# Altium PCB CindyLou Main Board copy_2023-08-16.pcbdoc (part 2 of 2)
Units mil, origin at the board's own origin, x right, y up, seen from the top; angles counter-clockwise.
Board outline 2655.6 x 2783.4 mil, 2 copper layers (Top Layer, Bottom Layer); 79 components, 76 nets, 317 pads, 120 vias.
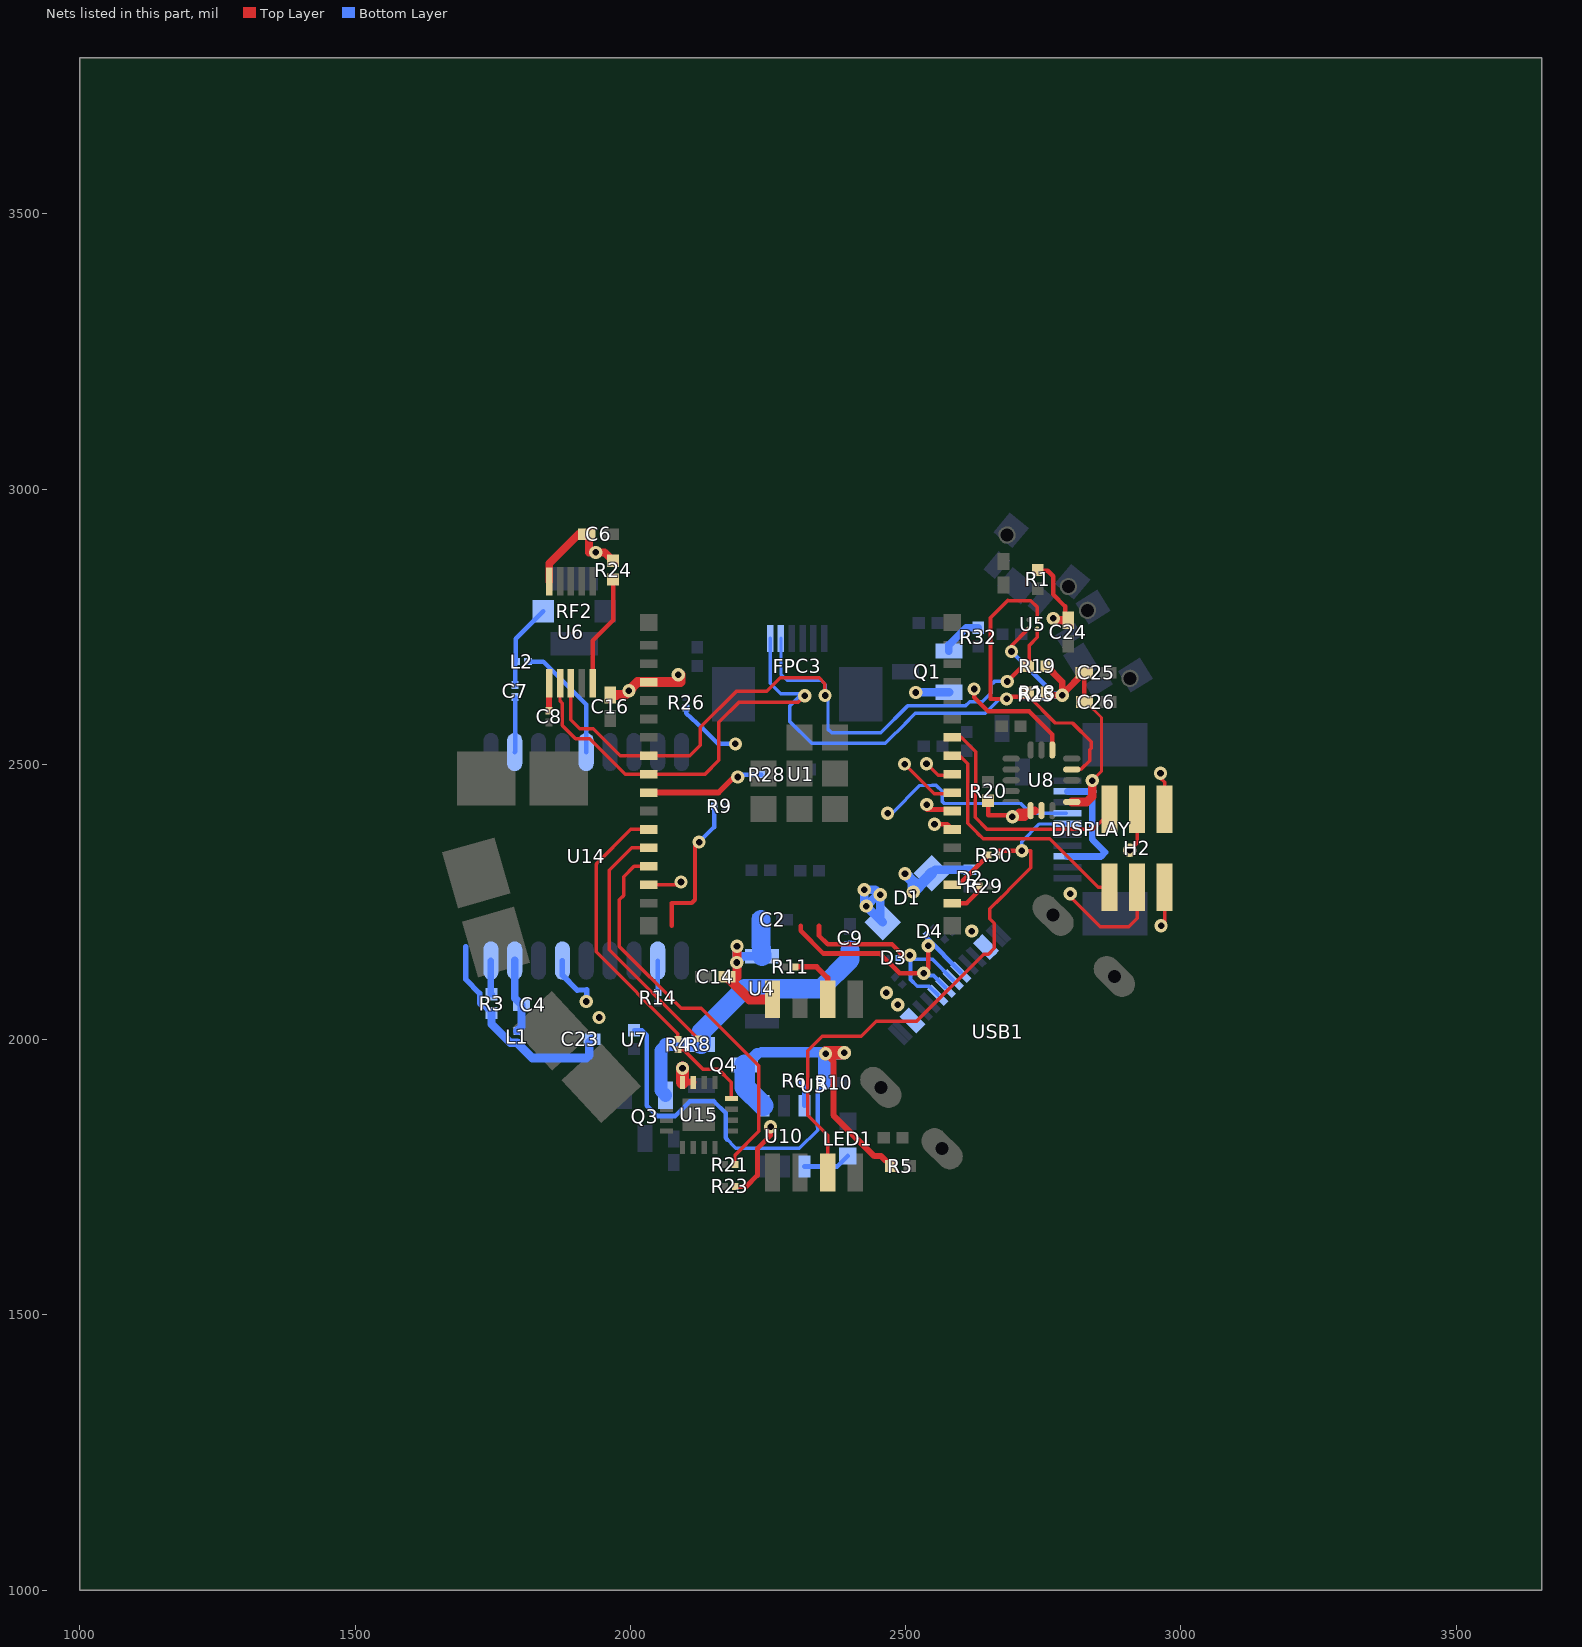
[diagram p2: the nets of this part, all layers, seen from the top]

## Via types
v1: diameter 24, hole 12, Top Layer to Bottom Layer, tented both sides, 120 vias

## Nets (pads, with @x,y where several pads share a name; then routed paths per layer and width w, separated by ;. In a path a pad name is that pad's centre, name@x,y a point inside that pad or via, vN(x,y) a via of type N, cw(c..) or ccw(c..) an arc to the next point about the centre after c; other vN are vias at no path point) (continued)
R32_2: Q1.1 R32.2 | length 77.2
  Bottom Layer w14: Q1.1@2578.57,2705.8 2578.57,2716.77 2610.04,2748.24 R32.2@2631.8,2748.24
RF2_1: C7.2 L2.1 RF2.1 | length 155.6
  Bottom Layer w8.33: C7.2@1790.7,2643.9 1790.7,2685.5 L2.1@1792,2686.8 1792,2728.5 RF2.1@1841.82,2778.28
RS: DISPLAY.4 R26.1 | length 873.1
  Mid-Layer 2 w10: v1(2190.69,2537.3) 2200.42,2547.03 2383.02,2547.03 2467.22,2462.83 v1(2467.2,2411.4)
  Bottom Layer w5.98: v1(2467.2,2411.4) 2475.42,2411.43 2525.72,2461.73 2555.42,2461.48
  Bottom Layer w6.3: 2548.02,2461.73 2555.82,2461.73 2566.52,2451.03 2566.52,2432.53 2570.02,2428.93 2709.52,2428.93 2727.12,2411.43 DISPLAY.4@2792.22,2411.43
  Bottom Layer w8: R26.1@2101.22,2602.42 2101.19,2592.9 2131.12,2565.43 2159.22,2537.33 v1(2190.69,2537.3)
RXD0: H2.5 U1.40 | length 444.2
  Top Layer w6.3: U1.40@2584.78,2549.14 2601.16,2549.14 2622.82,2527.48 ; 2622.82,2527.43 2627.32,2522.98 2626.32,2403.93 2647.82,2382.43 2840.82,2382.43 2870.52,2412.13 H2.5@2870.52,2418.5
S$70160: 
S$172033: 
SCL_BUS1: FPC3.6 R18.1 U1.8 U5.A2 U6.2 U8.4 | length 1913.9
  Top Layer w6.3: U6.2@1872.12,2647.53 1872.12,2615.63 1876.42,2611.33 1876.42,2570.63 1900.22,2546.83 1926.02,2546.83 1990.64,2482.21 U1.8@2033.6,2482.21 2135.6,2482.21 2160.82,2507.43 2160.82,2576.73 2197.22,2613.13 2305.22,2613.13 v1(2316.8,2624.7) ; 2685.5,2797.6 2727.4,2797.6 2739.07,2785.93 U5.A2@2739.07,2762.58 ; R18.1@2721.86,2630.6 2721.86,2625.33 2771.99,2575.2 2803.19,2575.2 2837.52,2540.87 2837.52,2529.43 2834.62,2526.53 2834.62,2506.88 2818.59,2490.84 U8.4@2801.97,2490.85
  Top Layer w7: v1(2683.4,2619) 2654.32,2619.03 2654.32,2766.43 2685.52,2797.63
  Top Layer w8: v1(2683.4,2619) 2687.53,2623.13 2721.82,2623.13 R18.1@2721.82,2630.63
  Bottom Layer w5.98: FPC3.6@2253.84,2728.95 2253.84,2647.61 2273.12,2628.33 2313.22,2628.33 v1(2316.8,2624.7)
  Bottom Layer w6.3: v1(2316.8,2624.7) 2308.12,2624.73 2289.12,2605.73 2289.12,2578.53 2329.42,2538.23 2463.32,2538.23 2502.82,2577.73 2511.32,2586.73 ; 2499.57,2574.48 2511.32,2586.73 ; v1(2683.4,2619) 2671.02,2619.03 2644.92,2592.93 2517.52,2592.93 2511.32,2586.73
SD_MODE: R4.1 U15.4 | length 150.9
  Top Layer w6.3: R4.1@2086.35,1981.35 2096.42,1981.33 2131.32,1946.53 2159.22,1946.53 2183.32,1922.53 U15.4@2183.3,1892.95
SDA_BUS1: FPC3.5 R19.1 U1.7 U5.B2 U6.3 U8.6 | length 1677.5
  Top Layer w6.3: U6.3@1891.84,2647.53 1891.84,2581.06 1908.15,2564.76 1932.35,2564.76 1981.43,2515.67 U1.7@2033.6,2515.67 2107.86,2515.67 2126.82,2534.63 2126.82,2567.12 2192.72,2633.03 2247.72,2633.03 2272.42,2657.73 2342.92,2657.73 2353.35,2646.66 v1(2353.8,2625.2) ; R19.1@2721.76,2678.4 2725,2681.64 2725,2716.7 2739.07,2730.77 U5.B2@2739.07,2746.84
  Top Layer w8: v1(2624.4,2637) 2624.42,2621.83 2649.82,2596.43 2724.32,2596.43 2766.52,2554.23 U8.6@2766.52,2526.23 ; v1(2684.52,2650.67) 2712.25,2678.4 R19.1@2721.76,2678.4
  Mid-Layer 2 w8: v1(2624.4,2637) 2648.22,2637.03 2661.86,2650.67 v1(2684.52,2650.67)
  Bottom Layer w5.98: FPC3.5@2273.52,2728.95 2273.52,2663.78 2284.77,2652.53 2346.42,2652.53 2353.82,2645.13 v1(2353.8,2625.2)
  Bottom Layer w6.3: v1(2353.8,2625.2) 2359.02,2625.23 2359.02,2564.13 2365.92,2557.23 2454.62,2557.23 2503.52,2606.13 2608.42,2606.13 2616.22,2613.93 2639.22,2613.93 2654.82,2629.53 2654.82,2644.03 2661.46,2650.67 v1(2684.52,2650.67)
SPI_CLK: DISPLAY.5 R30.2 U3.3 | length 1042.2
  Top Layer w6: 2674.52,2259.03 2698.32,2282.93 2727.22,2311.83 2727.22,2343.03 v1(2711.2,2343)
  Top Layer w6.3: U3.3@2358.2,1758.61 2358.22,1826.43 2322.32,1862.23 2322.32,1979.83 2348.42,2005.93 2419.52,2005.93 2446.92,2033.33 2519.82,2033.33 2641.72,2155.23 2650.62,2155.23 2661.12,2165.73 2661.12,2211.63 2653.12,2219.63 2653.12,2237.63 2674.52,2259.03
  Top Layer w8: R30.2@2669.32,2334.93 2669.32,2343.03 v1(2711.2,2343)
  Bottom Layer w5.98: v1(2711.2,2343) 2711.2,2359.8 2743.14,2391.75 DISPLAY.5@2794.22,2391.75
TXD0: H2.6 U1.39 | length 447.9
  Top Layer w6.3: U1.39@2584.78,2515.67 2598.13,2515.67 2612.82,2500.98 2612.82,2392.98 2630.32,2375.48 ; 2630.32,2375.43 2640.72,2365.03 2761.67,2365.03 2849.89,2276.81 H2.6@2870.52,2276.76
U1_9: R28.2 U1.9 | length 223.1
  Top Layer w10.4: U1.9@2033.6,2448.75 2159.94,2448.75 2192.82,2481.63 2192.82,2479.47 v1(2195.22,2477.07)
  Bottom Layer w8: v1(2195.22,2477.07) 2199.45,2481.3 R28.2@2238.19,2481.3
U1_11: R4.2 U1.11 | length 502.1
  Top Layer w6.3: U1.11@2033.6,2381.82 2000.51,2381.82 1937.72,2319.03 1937.72,2159.53 2086.35,2010.9 R4.2@2086.35,2000.37
U1_12: R8.2 U1.12 | length 462.2
  Top Layer w6.3: U1.12@2033.6,2348.35 2002.54,2348.35 1961.52,2307.33 1961.52,2163.1 R8.2@2123.35,2001.27
U1_13: R21.2 U1.13 | length 724.7
  Top Layer w6.3: U1.13@2033.6,2314.89 2006.52,2314.93 1987.62,2296.03 1987.62,2261.83 1979.82,2254.03 1979.82,2169.13 2092.02,2056.93 2128.92,2056.93 2233.22,1952.73 2233.22,1833.43 2190.02,1790.23 R21.2@2190.02,1772.93
U1_14: R23.2 U1.14 | length 719.9
  Top Layer w6.3: U1.14@2033.6,2281.42 2087.02,2281.42 v1(2092,2286.4)
  Top Layer w9: R23.2@2190.12,1733.13 2210.42,1733.13 2230.72,1753.43 2230.72,1801.83 2254.79,1825.9 v1(2254.79,1841.7)
  Mid-Layer 2 w9: v1(2092,2286.4) 2092.02,2244.43 2136.32,2200.13 2136.32,2122.23 2136.32,1960.17 v1(2254.79,1841.7)
U1_16: R9.2 | length 275
  Top Layer w8: 2074.94,2206.62 2074.94,2248.23 2111.52,2248.23 2117.42,2254.13 2117.42,2358.83 v1(2124.8,2358.8)
  Bottom Layer w8: v1(2124.8,2358.8) 2152.09,2386.09 R9.2@2152.11,2423.93
U1_31: R29.1 U1.31 | length 66.5
  Top Layer w8: U1.31@2584.78,2247.96 2610.95,2247.96 2633.72,2270.73 R29.1@2633.71,2278.83
U1_32: R30.1 U1.32 | length 87.7
  Top Layer w8: U1.32@2584.78,2281.42 2596.76,2281.42 R30.1@2650.31,2334.98
U1_35: H2.4 U1.35 | length 619.9
  Top Layer w6.3: v1(2799.22,2265.07) 2799.22,2259.68 2853.82,2205.08 2905.32,2205.08 2920.52,2220.28 H2.4@2920.52,2276.76
  Top Layer w8.4: v1(2552.5,2391.2) 2575.4,2391.2 U1.35@2584.78,2381.82
  Mid-Layer 2 w8.4: v1(2552.5,2391.2) 2627.42,2391.23 2653.32,2365.33 2653.32,2308.73 2678.32,2283.73 2719.72,2283.73 2745.22,2309.23 2786.32,2309.23 2799.22,2296.33 v1(2799.22,2265.07)
U1_36: H2.2 U1.36 | length 646.8
  Top Layer w6.3: v1(2964.12,2206.97) 2970.52,2213.38 H2.2@2970.52,2276.76
  Top Layer w8.4: v1(2538.52,2426.97) 2538.52,2417.98 U1.36@2587.09,2417.98
  Mid-Layer 2 w8.4: v1(2538.52,2426.97) 2545.36,2420.13 2629.72,2420.13 2680.72,2369.13 2762.82,2369.13 2924.98,2206.97 v1(2964.12,2206.97)
U1_37: H2.3 U1.37 | length 716.8
  Top Layer w6: v1(2498.09,2500.5) 2551.84,2446.75 2584.79,2446.75 U1.37@2584.78,2448.75
  Top Layer w6.3: v1(2907.4,2344.1) 2920.52,2357.22 H2.3@2920.52,2418.5
  Mid-Layer 2 w7.99: 2841.6,2419.9 2852.43,2409.08 2907.4,2409.08 v1(2907.4,2344.1)
  Mid-Layer 2 w8: v1(2498.09,2500.5) 2500.02,2500.53 2536.62,2463.83 2561.42,2463.83 2578.12,2480.53 2780.92,2480.53 2841.62,2419.93
U1_38: H2.1 U1.38 | length 567.7
  Top Layer w6: v1(2537.99,2501.3) 2559.08,2480.21 2584.79,2480.21 U1.38@2584.78,2482.21
  Top Layer w6.3: v1(2963.12,2483.77) 2963.12,2475.08 2970.52,2467.68 H2.1@2970.52,2418.5
  Mid-Layer 2 w6: 2918.4,2512.3 2946.93,2483.77 v1(2963.12,2483.77)
  Mid-Layer 2 w8: v1(2537.99,2501.3) 2538.39,2500.9 2771.1,2500.9 2782.5,2512.3 2918.4,2512.3
U3_6: R11.1 U3.6 | length 105.6
  Top Layer w10: R11.1@2299.81,2131.9 2338.52,2131.93 2358.22,2112.23 U3.6@2358.2,2073.2
U4_2: C9.2 Q3.2 Q4.2 | length 528.6
  Bottom Layer w23.7: Q3.2@2063.9,1898.87 2055.35,1907.42 2055.35,1980.16 2063.92,1988.73 2063.92,1991.36 Q4.2@2128.88,1991.36
  Bottom Layer w35: Q4.2@2128.92,1991.33 2128.92,2013.93 2207.32,2092.33 2345.82,2092.33 ; 2345.8,2092.29 2399.1,2145.59 C9.2@2399.1,2162.34
U6_1: C8.2 U6.1 | length 50.1
  Top Layer w10.31: C8.2@1852.12,2597.43 U6.1@1852.48,2647.54
U6_5: R24.1 U6.5 | length 203.6
  Top Layer w8.31: U6.5@1931.22,2647.54 1931.22,2724.93 1968.54,2762.25 R24.1@1968.55,2835.72
U10_1: LED1.1 U10.1 | length 86.6
  Bottom Layer w8.4: U10.1@2316.3,1769.48 2375.91,1769.48 LED1.1@2394.99,1788.58
U10_6: R6.1 U10.6 | length 48.9
  Bottom Layer w8.4: R6.1@2307.61,1925 2316.3,1916.32 U10.6@2316.3,1879.72
U14_2: R14.2 U14.2 | length 58.1
  Bottom Layer w8: U14.2@2049.64,2143.59 2049.62,2085.59 R14.2@2049.7,2085.51
U14_8: C4.2 L1.2 U14.8 | length 136.6
  Bottom Layer w14.33: U14.8@1789.8,2143.59 1789.78,2075.56 C4.2@1802.44,2062.9 1802.44,2024.04 L1.2@1794.1,2015.7
U14_9: R3.2 U14.9 | length 61.8
  Bottom Layer w12: U14.9@1746.49,2143.59 1746.47,2083.67 R3.2@1747.8,2082.34
U14_11: C7.1 U14.11 | length 100.3
  Bottom Layer w8.33: U14.11@1789.78,2522.43 1790.7,2523.35 C7.1@1790.7,2622.3
U14_14: L2.2 U14.14 | length 224.8
  Bottom Layer w8.33: L2.2@1813.6,2686.8 1841.72,2686.83 1919.72,2608.83 U14.14@1919.72,2522.43
USB-D+: D3.1 USB1.A6 USB1.B6 | length 428.5
  Top Layer w8.4: 2342.65,2206.62 2342.65,2189 2358.72,2172.93 2475.22,2172.93 2494.92,2153.23 v1(2507.8,2153.2)
  Bottom Layer w7: USB1.B6@2558.52,2080.73 2542.42,2096.83 2523.92,2096.83 2521.22,2096.83 2509.02,2108.93 2509.02,2153.23 v1(2507.8,2153.2) 2507.82,2145.93 2549.02,2145.93 USB1.A6@2586.38,2108.57
  Bottom Layer w7.99: D3.1@2486.85,2148.5 2491.55,2153.2 v1(2507.8,2153.2)
USB-D-: D4.1 USB1.A7 USB1.B7 | length 462.9
  Top Layer w8.4: 2309.19,2206.62 2309.19,2197.41 2350.2,2156.4 2453.2,2156.4 2489,2120.6 v1(2533,2120.6) 2541.2,2128.8 v1(2541.2,2170.4)
  Bottom Layer w7: v1(2533,2120.6) 2537,2116.6 2550.49,2116.6 USB1.A7@2572.45,2094.64
  Bottom Layer w8.4: D4.1@2538.09,2191.41 2538.1,2184.71 USB1.B7@2600.34,2122.47
VBUS: D1.1 Q4.3 R5.1 R10.2 U7.1 U10.4 | length 2294.3
  Top Layer w11: v1(2354.7,1974.2) 2368.62,1960.33 2368.62,1862.83 2443.32,1788.23 2455.62,1788.23 R5.1@2473.52,1770.33
  Top Layer w24.3: v1(2354.7,1974.2) 2356.6,1976.1 v1(2388.5,1976.1)
  Mid-Layer 2 w37.84: v1(2354.7,1974.2) 2354.7,2168.8 v1(2428.4,2242.5) ; v1(2388.5,1976.1) 2388.5,2235.81 v1(2424.99,2272.3)
  Bottom Layer w6.3: 2172.92,1821.33 2191.72,1802.53 2307.12,1802.53 2340.12,1835.53 2340.12,1861.93
  Bottom Layer w8.31: U7.1@2006.6,2017.04 2021.02,2017.03 2029.92,2008.13 2029.92,1880.13 2048.92,1861.13 2081.42,1861.13 2107.92,1887.63 2151.92,1887.63 2172.92,1866.63 2172.92,1821.33 2176.22,1818.03 ; 2340.15,1841.96 2340.15,1909.19 R10.2@2352.66,1921.7
  Bottom Layer w15.75: Q4.3@2207.61,1953.96 2213.6,1953.96 2238.12,1978.48 2350.43,1978.48 v1(2354.7,1974.2)
  Bottom Layer w16.02: v1@2425.39,2244 2424.99,2244.4 v1(2424.99,2272.3) 2444.5,2272.3 v1(2453.8,2263) ; v1(2428.4,2242.5) 2448.9,2263 v1(2453.8,2263) ; v1(2428.4,2242.5) D1.1@2458.32,2213.23 ; D1.1@2458.36,2213.26 2453.8,2217.81 v1(2453.8,2263)
  Bottom Layer w17.76: Q4.3@2207.61,1953.96 2229.76,1976.1 v1(2388.5,1976.1)
  Bottom Layer w24.3: R10.2@2352.66,1921.7 2352.66,1972.16 v1(2354.7,1974.2)
  Bottom Layer w25: v1(2354.7,1974.2) 2356.6,1976.1 v1(2388.5,1976.1)
  Bottom Layer w37.84: Q4.3@2207.61,1953.96 2207.62,1913.6 U10.4@2241.5,1879.72
VBUS_: D1.2 D2.1 USB1.A4 USB1.A9 USB1.B4 USB1.B9 | length 208.4
  Bottom Layer w16.02: D1.2@2547.44,2302.34 2553.75,2308.65 D2.1@2617.3,2308.65
  Bottom Layer w20.04: v1(2498.89,2301.5) 2513.9,2286.49 v1(2513.9,2268) ; v1(2513.9,2268) 2536.9,2291.8 D1.2@2547.44,2302.34 2547.44,2301.54 v1(2513.9,2268)
  other v1: 2485.61,2063.37 2465.08,2085.24 2620.1,2197.1
VCC: C2.1 C6.2 C14.2 C16.2 C23.2 C24.2 C25.2 C26.2 DISPLAY.2 DISPLAY.8 L1.1 Q1.2 R1.1 R3.1 R18.2 R19.2 R20.1 R24.2 R25.1 U1.3 U3.8 U4.3 U5.B1 U6.10 U8.1 U8.14 U8.15 U14.6 U15.7 U15.8 | length 3263.2
  Top Layer w6: C26.2@2824.84,2613.3 2827.8,2613.3 2855.9,2585.2 2855.9,2487.35 v1(2839.12,2470.57)
  Top Layer w6.3: v1(2692.32,2705.17) 2692.32,2715.82 U5.B1@2723.34,2746.83
  Top Layer w8: R20.1@2649.82,2434.04 2649.82,2407.43 2727.12,2407.43 U8.14@2727.12,2415.63 ; R1.1@2740.22,2853.33 2741.92,2851.63 2758.22,2851.63 2768.12,2841.73 2768.12,2808.63 2789.72,2787.03 2789.72,2761.93 C24.2@2795.62,2761.93 ; U8.15@2746.85,2415.63 2705.31,2416.04 v1(2694.04,2404.77) ; C25.2@2824.52,2666.73 C26.2@2824.84,2613.3 ; v1(2694.04,2404.77) 2700.81,2411.54 v1(2694.04,2404.77)
  Top Layer w12.32: U15.8@2094.64,1922.42 U15.7@2114.32,1922.42
  Top Layer w12.4: R19.2@2755.84,2678.4 2784.6,2649.64 v1(2784.6,2625.5) ; R18.2@2755.94,2630.6 2761.04,2625.5 v1(2784.6,2625.5) ; C25.2@2824.52,2666.77 2784.6,2626.85 v1(2784.6,2625.5)
  Top Layer w14.33: U6.10@1852.52,2832.53 1852.52,2864.83 1907.52,2919.83 1925.02,2919.83 1925.02,2885.03 v1@1937.02,2885.03 ; v1(1937.05,2885.06) 1953.27,2885.06 R24.2@1968.55,2869.8
  Top Layer w15: v1(2768.4,2765.2) 2771.64,2761.96 C24.2@2795.6,2761.96
  Top Layer w15.67: v1@2694.02,2404.73 2715.92,2404.73 U8.14@2727.12,2416.03 ; U8.14@2727.15,2416.04 2734.39,2416.04 ; U8.1@2801.97,2431.79 2829.17,2431.78 2839.12,2441.73 v1(2839.12,2470.57)
  Top Layer w16: C14.2@2175.76,2114 2193.7,2114 v1(2193.7,2169.6)
  Top Layer w18: C14.2@2175.76,2114 2216.57,2073.19 U3.8@2258.2,2073.2
  Top Layer w18.3: C16.2@1963.65,2626.12 1989.61,2626.11 v1(1997.3,2633.8) 2013.03,2649.53 U1.3@2033.6,2649.53 2090.72,2649.53 2090.72,2662.9 v1(2087,2662.9)
  Top Layer w23.7: U15.8@2094.64,1922.42 2094.69,1922.5 v1(2094.69,1948)
  Mid-Layer 2 w6: v1(2839.12,2470.57) 2894.17,2470.57 2895.2,2471.6 2899.6,2471.6 2904.9,2466.3 2914.1,2466.3 2920.4,2460 2924.5,2460 2931.91,2452.59 2938.31,2452.59 2943.7,2447.2 2952.1,2447.2
  Mid-Layer 2 w19.68: v1(1937.05,2885.06) 1937.05,2853.74 1976.19,2814.6 1976.19,2740.2 1994.69,2721.7 2028.2,2721.7 v1(2087,2662.9) ; v1(1997.3,2633.8) 2026.4,2662.9 v1(2087,2662.9) ; 2155.69,2693.2 2117.3,2693.2 v1(2087,2662.9)
  Bottom Layer w8.4: v1(2692.32,2705.17) 2753.52,2643.97 2753.52,2625.53 v1(2784.6,2625.5)
  Bottom Layer w10: 1701.1,2169 1701.1,2109.25 1726.22,2084.13 1726.22,2065.93 1731.62,2060.53 1734.82,2060.53 R3.1@1747.82,2048.23 ; U14.6@1876.41,2143.59 1876.39,2116.91 1903.3,2090 1920.7,2090.2 v1(1919.8,2069.2)
  Bottom Layer w12: v1(2193.3,2140.1) v1(2193.7,2169.6)
  Bottom Layer w12.01: DISPLAY.8@2794.22,2332.69 2854.89,2332.69 2862.5,2340.3 2839.12,2363.68 v1(2839.12,2470.57) 2839.12,2452.67 2840.99,2450.8 DISPLAY.2@2794.22,2450.8
  Bottom Layer w14: R25.1@2754.04,2626.6 2755.14,2625.5 v1(2784.6,2625.5)
  Bottom Layer w15: R3.1@1747.82,2048.23 1747.82,2028.03 1781.72,1994.13 L1.1@1794.1,1994.11
  Bottom Layer w15.67: L1.1@1794.1,1994.11 1821.72,1966.53 1920.02,1966.53 1925.02,1971.53 1925.02,1994.93 C23.2@1930.42,2000.43
  Bottom Layer w16: v1(2193.3,2140.1) 2204.56,2151.36 U4.3@2239,2151.36 ; v1(2193.3,2140.1) v1(2193.7,2169.6)
  Bottom Layer w16.02: v1(2518.3,2630.7) Q1.2@2578.57,2631
  Bottom Layer w35: C2.1@2237.14,2217.6 2237.12,2174.13 U4.3@2239,2151.36
  other v1: 1943.15,2040.06
pads on no net: U1.5 U1.6 U1.15 U1.34 U1.41 U1.44 U3.1 U3.7 U6.6 U8.2 U8.3 U8.9 U8.11 U10.5 U14.4 U14.7 U14.13 U14.15 U14.16 U14.17 U14.18 U15.5 U15.6 U15.12 U15.13 USB1.0 USB1.A8 USB1.B8

## Polygon pours and split planes (outlines as drawn)
GND on Mid-Layer 2 (solid): 1738.1,2479.9 1627.4,2482 1736,2482 1738.1,2479.9
GND on Mid-Layer 2 (solid): 2112.8,2492.7 2102.1,2482 1736,2482 1735.4,2482.6 1599.4,2482.6 1598.1,2483.9 1598.1,3098.6 1603.4,3093.3 2055.4,3093.3 2060.9,3087.8 2060.9,2637.8 2068.9,2629.8 2109.9,2629.8 2112.8,2626.9 2112.8,2492.7
VBUS_ on Mid-Layer 2 (solid): 2509.8,2326.4 2478.4,2291.5 2471.4,2197.5 2444.4,2090.7 2451.6,2079.3 2452.6,2079.3 2494.6,2037.3 2494.6,2055.7 2639.5,2200.6 2639.5,2214.9 2523.8,2330.6
VCC on Mid-Layer 2 (solid): 18 vertices, not listed, extent 1500,1500 3155.6,3283.4
GND on Top Layer (solid): 17 vertices, not listed, extent 2007.9,2673.8 2611.7,2784.1
GND on Top Layer (solid): 2216,2395.3 2216,2549.3 2216,2552.3 2239,2575.3 2400.5,2575.3 2400.5,2397.3 2402.5,2395.3
GND on Bottom Layer (solid): 1774.55,2650.4 1764.7,2647.8 1767.3,2650.4 1774.55,2650.4
GND on Bottom Layer (solid): 22 vertices, not listed, extent 1802.4,2559.3 1948.8,2757.3
GND on Bottom Layer (solid): 35 vertices, not listed, extent 1700.4,2476.1 2059,2894.6
GND on Bottom Layer (solid): 1807.5,2481.8 1807.5,2565.8 1800.5,2572.8 1800.5,2666.8 1804.5,2674.1 1832.8,2674.3 1841.3,2672.3 1849.5,2664.8 1905.5,2608.8 1905.5,2562.8 1904.5,2561.8 1855.5,2561.8 1853.5,2559.8 1853.5,2482.8 1854.5,2481.8
GND on Bottom Layer (solid): 1824,1996.1 1838,1995.3 1879.1,1996.4 1900.2,1994.9 1899.5,2079.3 1898.8,2080 1823.6,2080 1823.1,2079.5 1823.1,2068.5
VCC on Bottom Layer (solid): 1907.2,1995.8 1908.2,1999.3 1908.2,2084.7 1969.1,2085.3 1970.1,2063.6 1953.4,2020.5 1954.8,1995.2 1936.8,1995.2
BATTERY on Bottom Layer (solid): 23 vertices, not listed, extent 1830.1,1802.7 2096.3,1938.46
GND on Internal Plane 1 (split plane): 169 vertices, not listed, extent 2336.69,1956.2 2406.51,1994.1
GND on Internal Plane 1 (split plane): 95 vertices, not listed, extent 1925.14,2022.07 1961.16,2058.06
GND on Internal Plane 1 (split plane): 157 vertices, not listed, extent 2447.07,2045.38 2503.62,2103.24
GND on Internal Plane 1 (split plane): 95 vertices, not listed, extent 1901.79,2051.2 1937.81,2087.2
GND on Internal Plane 1 (split plane): 257 vertices, not listed, extent 2835.82,2071.18 2922.72,2158.07
GND on Internal Plane 1 (split plane): 95 vertices, not listed, extent 2514.99,2102.61 2551.01,2138.6
GND on Internal Plane 1 (split plane): 155 vertices, not listed, extent 2175.29,2122.11 2211.71,2187.6
GND on Internal Plane 1 (split plane): 95 vertices, not listed, extent 2489.79,2135.2 2525.81,2171.2
GND on Internal Plane 1 (split plane): 95 vertices, not listed, extent 2272.29,2149.01 2308.31,2185
GND on Internal Plane 1 (split plane): 95 vertices, not listed, extent 2523.19,2152.41 2559.21,2188.4
GND on Internal Plane 1 (split plane): 95 vertices, not listed, extent 2602.09,2179.11 2638.11,2215.1
GND on Internal Plane 1 (split plane): 95 vertices, not listed, extent 1866.69,2181.51 1902.71,2217.5
GND on Internal Plane 1 (split plane): 257 vertices, not listed, extent 2724.47,2182.54 2811.36,2269.43
GND on Internal Plane 1 (split plane): 95 vertices, not listed, extent 2946.11,2188.97 2982.13,2224.97
GND on Internal Plane 1 (split plane): 192 vertices, not listed, extent 2406.98,2224.51 2471.81,2290.3
GND on Internal Plane 1 (split plane): 95 vertices, not listed, extent 2781.21,2247.07 2817.23,2283.07
GND on Internal Plane 1 (split plane): 95 vertices, not listed, extent 2495.89,2250.01 2531.91,2286
GND on Internal Plane 1 (split plane): 95 vertices, not listed, extent 2223.29,2261.11 2259.31,2297.1
GND on Internal Plane 1 (split plane): 95 vertices, not listed, extent 2073.99,2268.41 2110.01,2304.4
GND on Internal Plane 1 (split plane): 95 vertices, not listed, extent 2140.99,2281.7 2177.01,2317.7
GND on Internal Plane 1 (split plane): 95 vertices, not listed, extent 2480.88,2283.51 2516.9,2319.5
GND on Internal Plane 1 (split plane): 165 vertices, not listed, extent 2677.79,2296.11 2729.21,2361
GND on Internal Plane 1 (split plane): 95 vertices, not listed, extent 2166.49,2307.7 2202.51,2343.7
GND on Internal Plane 1 (split plane): 95 vertices, not listed, extent 2889.39,2326.11 2925.41,2362.1
GND on Internal Plane 1 (split plane): 95 vertices, not listed, extent 2241.19,2326.61 2277.21,2362.6
GND on Internal Plane 1 (split plane): 95 vertices, not listed, extent 2484.49,2327.01 2520.51,2363
GND on Internal Plane 1 (split plane): 95 vertices, not listed, extent 2106.79,2340.8 2142.81,2376.8
GND on Internal Plane 1 (split plane): 95 vertices, not listed, extent 2534.49,2373.2 2570.51,2409.2
GND on Internal Plane 1 (split plane): 95 vertices, not listed, extent 2676.03,2386.78 2712.05,2422.77
GND on Internal Plane 1 (split plane): 95 vertices, not listed, extent 2449.19,2393.41 2485.21,2429.4
GND on Internal Plane 1 (split plane): 95 vertices, not listed, extent 2520.51,2408.97 2556.53,2444.97
GND on Internal Plane 1 (split plane): 95 vertices, not listed, extent 2821.11,2452.57 2857.13,2488.57
GND on Internal Plane 1 (split plane): 95 vertices, not listed, extent 2177.21,2459.07 2213.23,2495.07
GND on Internal Plane 1 (split plane): 95 vertices, not listed, extent 2945.11,2465.78 2981.13,2501.77
GND on Internal Plane 1 (split plane): 95 vertices, not listed, extent 2480.08,2482.51 2516.1,2518.5
GND on Internal Plane 1 (split plane): 95 vertices, not listed, extent 2519.98,2483.3 2556,2519.3
GND on Internal Plane 1 (split plane): 95 vertices, not listed, extent 2172.68,2519.3 2208.7,2555.3
GND on Internal Plane 1 (split plane): 95 vertices, not listed, extent 2509.78,2547.3 2545.8,2583.3
GND on Internal Plane 1 (split plane): 95 vertices, not listed, extent 2059.09,2598.61 2095.11,2634.6
GND on Internal Plane 1 (split plane): 161 vertices, not listed, extent 2665.39,2601.01 2702.53,2668.67
GND on Internal Plane 1 (split plane): 95 vertices, not listed, extent 2298.79,2606.7 2334.81,2642.7
GND on Internal Plane 1 (split plane): 95 vertices, not listed, extent 2335.79,2607.2 2371.81,2643.2
GND on Internal Plane 1 (split plane): 95 vertices, not listed, extent 2766.59,2607.51 2802.61,2643.5
GND on Internal Plane 1 (split plane): 95 vertices, not listed, extent 2500.29,2612.7 2536.31,2648.7
GND on Internal Plane 1 (split plane): 95 vertices, not listed, extent 1979.29,2615.8 2015.31,2651.8
GND on Internal Plane 1 (split plane): 95 vertices, not listed, extent 2606.39,2619.01 2642.41,2655
GND on Internal Plane 1 (split plane): 18 vertices, not listed, extent 2894.59,2634.57 2911.67,2645.47
GND on Internal Plane 1 (split plane): 18 vertices, not listed, extent 2918.46,2643.31 2929.36,2660.39
GND on Internal Plane 1 (split plane): 95 vertices, not listed, extent 2068.99,2644.91 2105.01,2680.9
GND on Internal Plane 1 (split plane): 95 vertices, not listed, extent 2532.89,2650.91 2568.91,2686.9
GND on Internal Plane 1 (split plane): 18 vertices, not listed, extent 2885.87,2652.26 2896.76,2669.34
GND on Internal Plane 1 (split plane): 17 vertices, not listed, extent 2903.55,2667.17 2920.63,2678.07
GND on Internal Plane 1 (split plane): 95 vertices, not listed, extent 2674.31,2687.18 2710.33,2723.17
GND on Internal Plane 1 (split plane): 95 vertices, not listed, extent 2197.64,2701.66 2233.66,2737.66
GND on Internal Plane 1 (split plane): 95 vertices, not listed, extent 2750.39,2747.2 2786.41,2783.2
GND on Internal Plane 1 (split plane): 18 vertices, not listed, extent 2817.4,2758.1 2834.48,2769
GND on Internal Plane 1 (split plane): 18 vertices, not listed, extent 2841.27,2766.84 2852.17,2783.92
GND on Internal Plane 1 (split plane): 18 vertices, not listed, extent 2808.68,2775.79 2819.57,2792.87
GND on Internal Plane 1 (split plane): 17 vertices, not listed, extent 2826.36,2790.7 2843.44,2801.6
GND on Internal Plane 1 (split plane): 18 vertices, not listed, extent 2788.77,2801.37 2806.24,2812.03
GND on Internal Plane 1 (split plane): 17 vertices, not listed, extent 2774.03,2812.65 2784.68,2830.12
GND on Internal Plane 1 (split plane): 18 vertices, not listed, extent 2806.86,2816.12 2817.52,2833.59
GND on Internal Plane 1 (split plane): 17 vertices, not listed, extent 2785.3,2834.21 2802.77,2844.87
GND on Internal Plane 1 (split plane): 95 vertices, not listed, extent 2754.79,2851.61 2790.81,2887.6
GND on Internal Plane 1 (split plane): 95 vertices, not listed, extent 1919.04,2867.07 1955.06,2903.06
GND on Internal Plane 1 (split plane): 18 vertices, not listed, extent 2677.18,2895 2694.64,2905.66
GND on Internal Plane 1 (split plane): 17 vertices, not listed, extent 2662.44,2906.28 2673.09,2923.75
GND on Internal Plane 1 (split plane): 18 vertices, not listed, extent 2695.27,2909.75 2705.93,2927.22
GND on Internal Plane 1 (split plane): 17 vertices, not listed, extent 2673.71,2927.84 2691.18,2938.5

## Keep-outs
Keep-Out Layer:
  lines w8 net S$172033: 1999.42,3008.63 ccw(c2332.79,2386.54) 2664.82,1763.73
  lines w8.4 net S$70160: 2609.82,3011.03 cw(c2325.54,2378.76) 2918.89,2020.25 cw(c2917.37,2021.78) 2915.82,2023.33

## Other copper
Mid-Layer 2:
  pour cut-out net KEEPOUT: 2619.65,2789.95 2616.05,2786.35 1995.85,2786.35 1995.15,2787.05 1995.15,3121.35 2179.05,3120.65 2612.55,3122.65 2619.65,2992.35 2619.65,2789.95
Bottom Layer:
  region net BATTERY: 2253.3,1751.5 2252.8,1752 2252.8,1790.5 2184.8,1790.5 2140.3,1835 2067.8,1835 2065.3,1832.5 2065.3,1804 2066.8,1802.5 2126.3,1802.5 2136.8,1792 2136.8,1764.5 2147.3,1754 2147.3,1750.5 2147.8,1751 2209.3,1751
  region net GND: 2674.48,2169.82 2646,2198.2 2640.7,2230.6 2658.3,2246.7 2696.2,2245.6 2703.5,2240.4 2708.1,2236.6 2724.5,2219.7 2724.7,2219.5 2710.9,2206.7 2693.2,2187.1 2674.48,2169.82
  region net GND: 2457.43,1961.65 2449.03,1959.35 2435.33,1960.75 2416.53,1979.25 2480.93,2040.25 2509.83,2010.95 2512.07,2009.3 2490.23,1989.55 2470.53,1969.05 2457.43,1961.65
  region net GND: 2675.6,2168.7 2673.7,2169.1 2674.48,2169.82 2675.6,2168.7
  region net VBUS_: 2654.9,2145 2652.5,2147.4 2597.52,2202.18 2607.12,2214.08 2613.3,2221 2670.7,2162.8 2669.72,2162.23 2668.82,2161.43 2666.52,2158.93
  region net VBUS_: 2517.5,2015.4 2489.8,2043.5 2471.7,2051 2447.4,2085.9 2462.7,2099.4 2473.4,2099.9 2475.2,2092.5 2485.5,2081.5 2500.2,2066.3 2505.3,2059 2533.69,2030.7 2533.6,2030.7 2531.2,2026.2 2517.5,2015.4
  region net GND: 2262.75,2208.1 2264.25,2209.6 2262.25,2231.1 2286.75,2233.1 2303.25,2242.1 2304.8,2253.8 2323.7,2253.1 2332.25,2250.6 2334.75,2248.1 2334.75,2205.6
Internal Plane 1 (plane layer: these items are gaps in the copper):
  pour cut-out net KEEPOUT: 2620.5,2788.9 2616.9,2785.3 1996.7,2785.3 1996,2786 1996,3120.3 2179.9,3119.6 2619.9,3120.6 2620.5,2991.3 2620.5,2788.9

## Silkscreen, mask and mechanical layers (free items; w line width, h text height)
Top Overlay:
  lines w7.87: 1978.28,2717.81 cw(c1974.34,2717.9) 1978.28,2717.98
  text "R18" at 2639.8,2605.7 h25
Bottom Overlay:
  circle w10: c2068.42,2518.64 r5
  circle w10: c2520.94,2768.88 r5
  lines w10: 2063.42,2454.93 2063.42,2462.33 ; 2163.42,2454.93 2163.42,2462.33
  text "RESET" at 2800.13,2601.87 h27.56 r305
  text "Starling Watch 2023" at 2714.82,2376.12 h31.5
  text "CindyLou AM MAG" at 2678.42,2333.42 h31.5
  text "12" at 2722.6,2267.2 h25 r270
Document:
  circle w7.87: c2073.19,2506.48 r3.94
  circle w10: c2539.32,2764.65 r5
  region: 2003.87,2787.86 2610.17,2787.86 2610.17,2986.68 2003.87,2986.68
  region: 2003.87,2787.86 2610.17,2787.86 2610.17,2986.68 2003.87,2986.68
  region: 2003.87,2787.86 2610.17,2787.86 2610.17,2986.68 2003.87,2986.68
  region: 2214.5,2521.13 2269.62,2521.13 2269.62,2576.25 2240.09,2576.25 2214.5,2550.66
  region: 2218.44,2525.07 2265.68,2525.07 2265.68,2572.31 2242.06,2572.31 2218.44,2548.69
  lines w0.39: 2214.5,2521.13 2269.62,2521.13 2269.62,2576.25 2240.09,2576.25 2214.5,2550.66 2214.5,2521.13 ; 2218.44,2525.07 2265.68,2525.07 2265.68,2572.31 2242.06,2572.31 2218.44,2548.69 2218.44,2525.07
  lines w1.97: 1994.03,2169.75 1994.03,2996.52 2620.01,2996.52 2620.01,2169.75 1994.03,2169.75
  lines w5: 2003.87,2787.86 2610.17,2787.86 ; 2003.87,2787.86 2003.87,2179.6 2610.17,2179.6 2610.17,2787.86 ; 2003.87,2787.86 2003.87,2986.68 2610.17,2986.68 2610.17,2787.86
  lines w7.87: 1978.28,2717.81 cw(c1974.34,2717.9) 1978.28,2717.98

## Text inside footprints (layer, text, board x,y; h text height)
DISPLAY: Bottom Overlay "XX" at 2975.2,2563 h7.87 r90; Bottom Overlay "A" at 2971,2219.07 h7.87 r69